# Altium PCB Qadrature FM demodulator.PcbDoc (part 1 of 2)
Units mm, origin at the board's own origin, x right, y up, seen from the top; angles counter-clockwise.
Board outline 65 x 50 mm, 2 copper layers (Top Layer, Bottom Layer); 40 components, 19 nets, 115 pads, 103 vias.
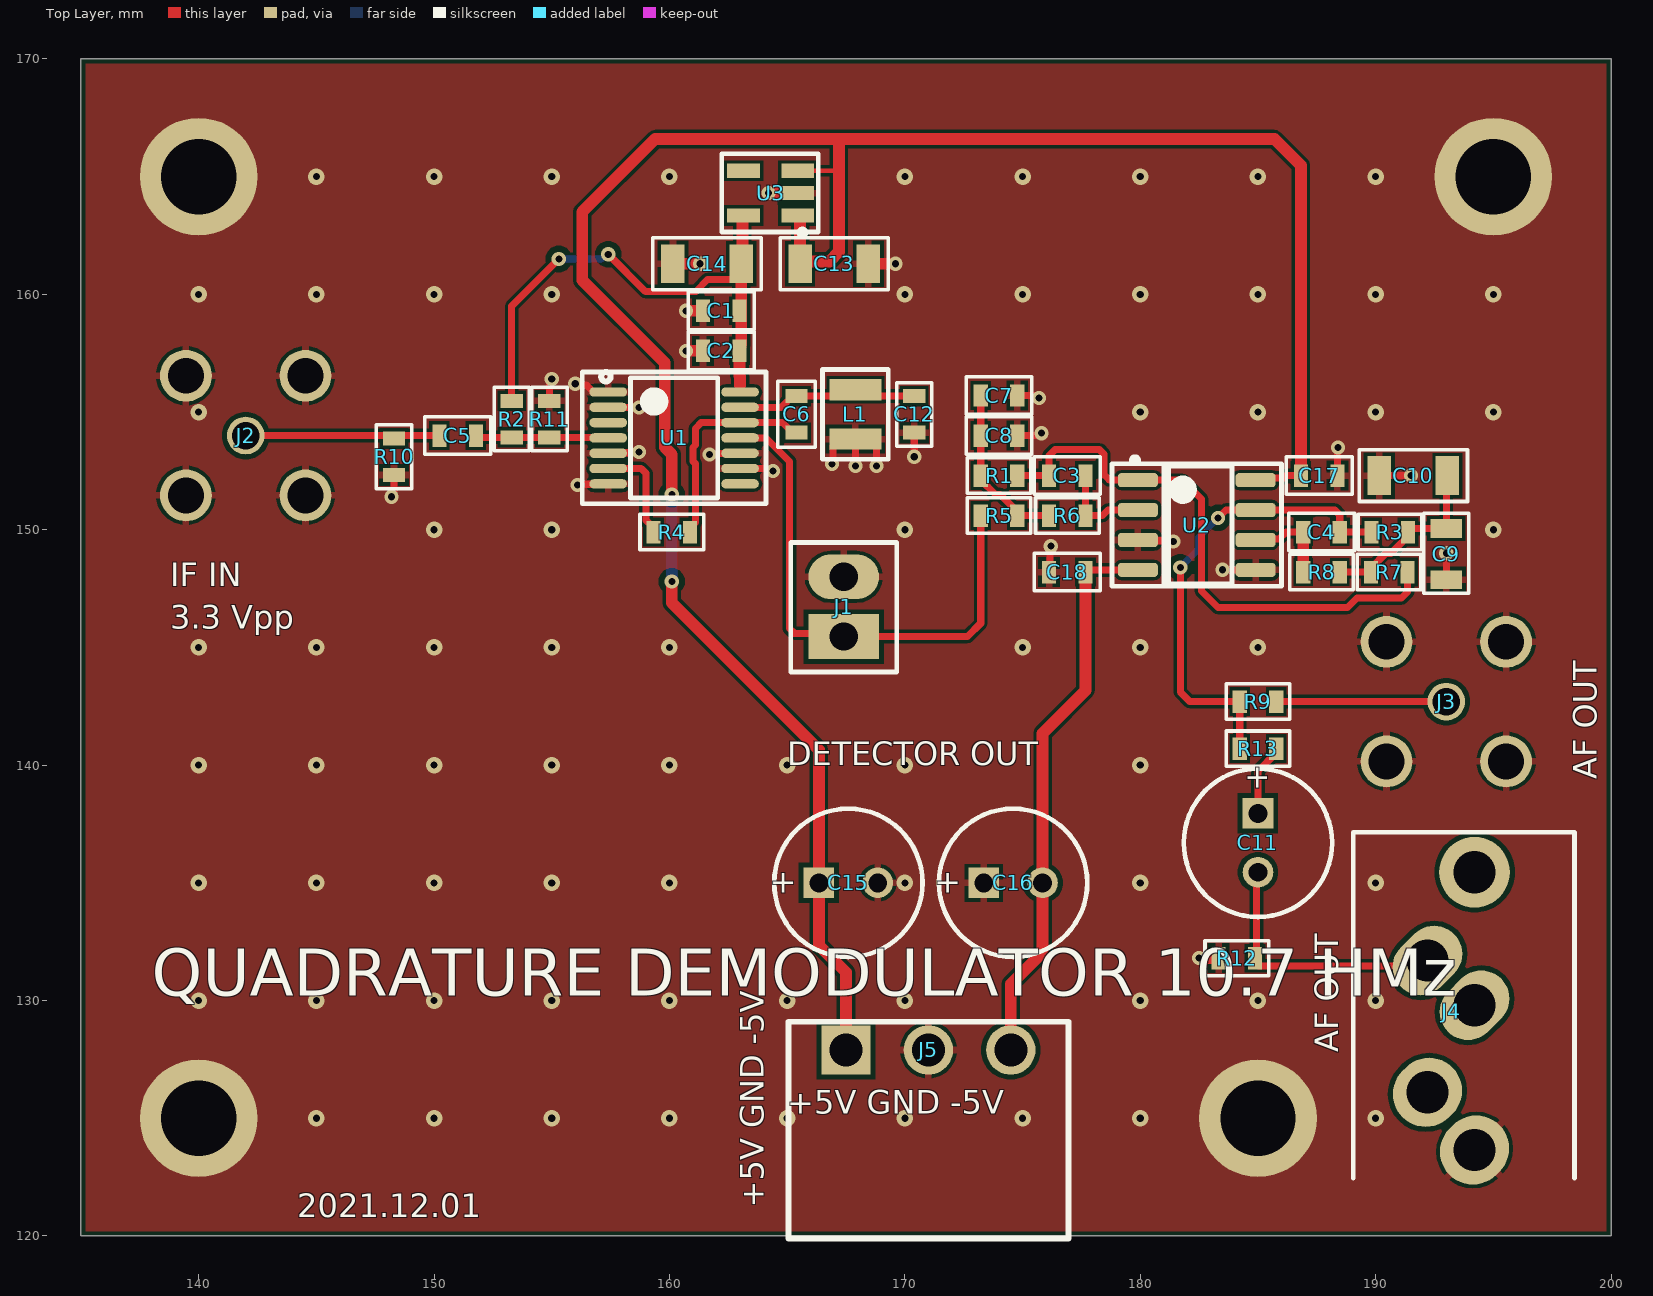
[diagram p0: Top Layer view]
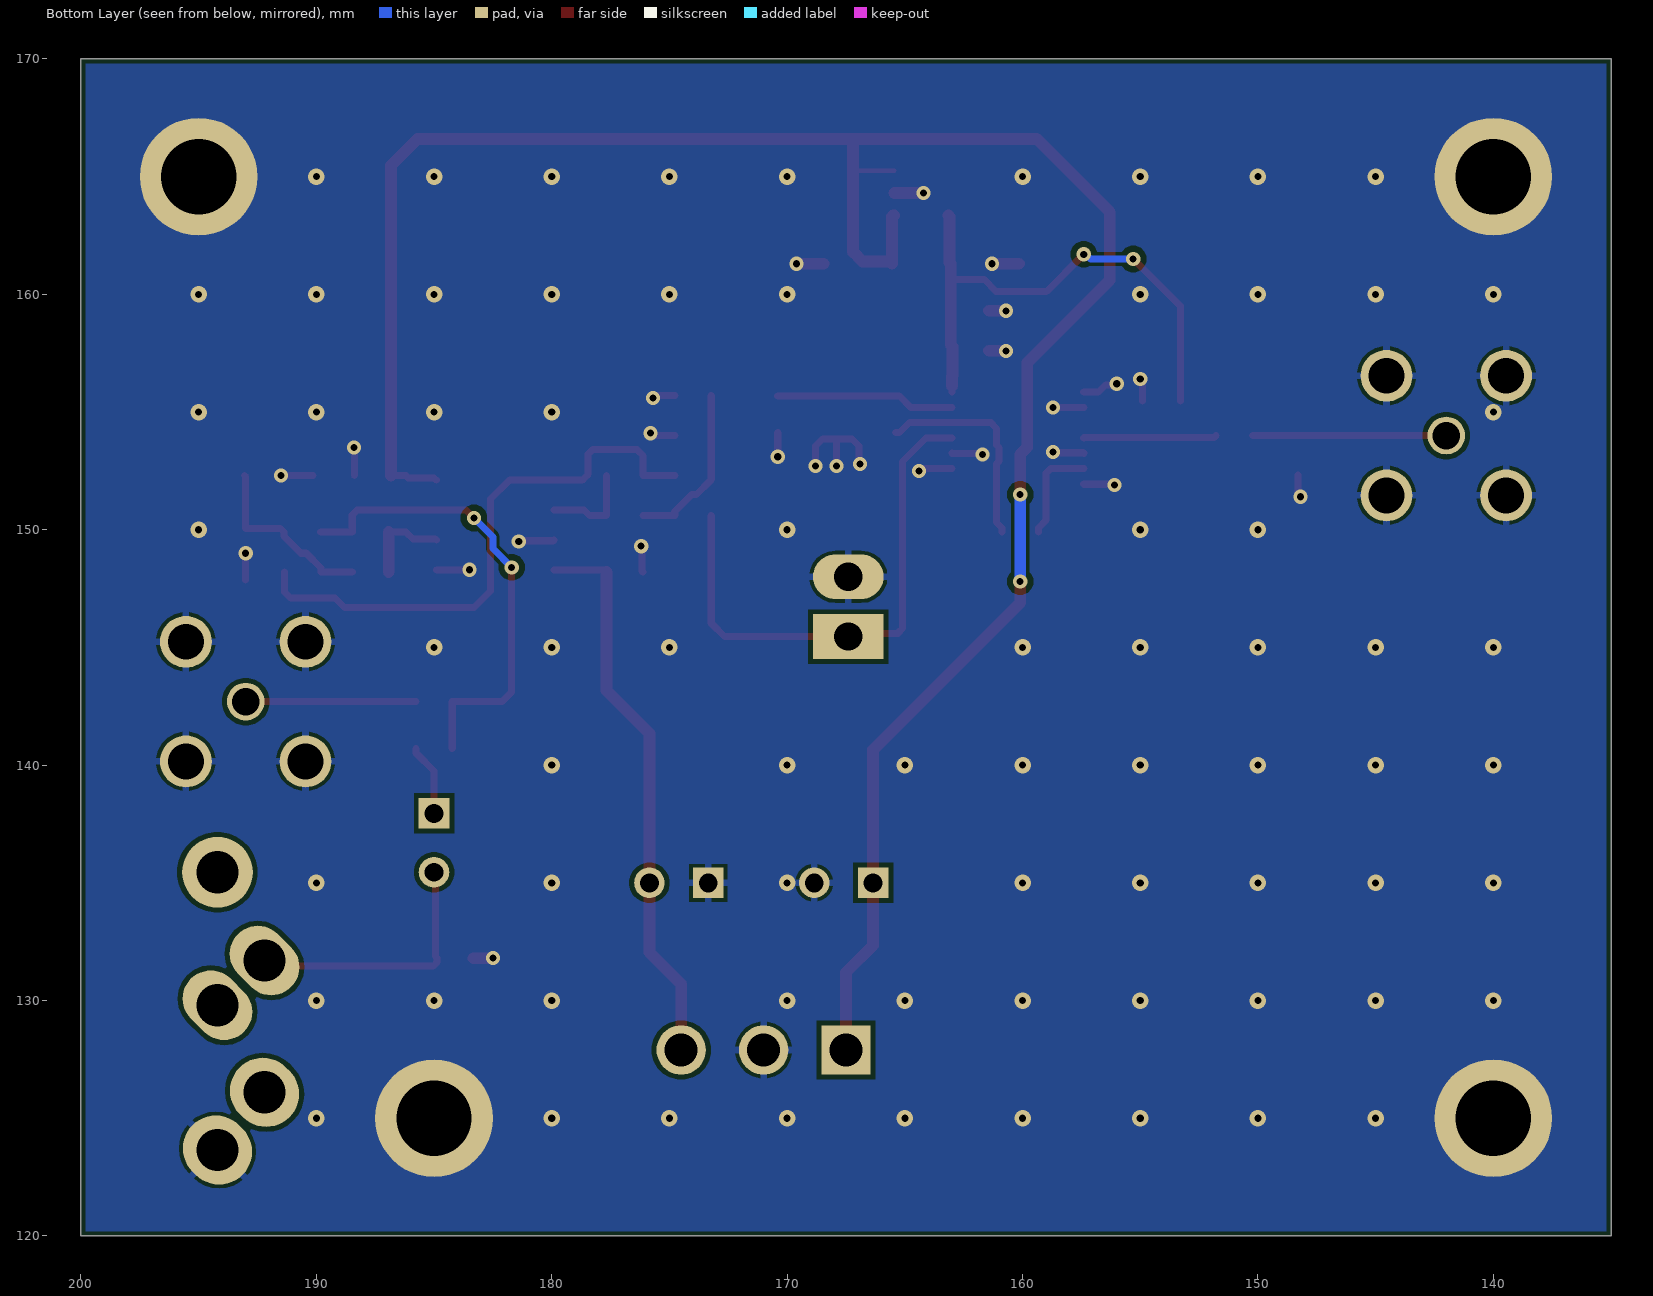
[diagram p1: Bottom Layer view, seen from below]
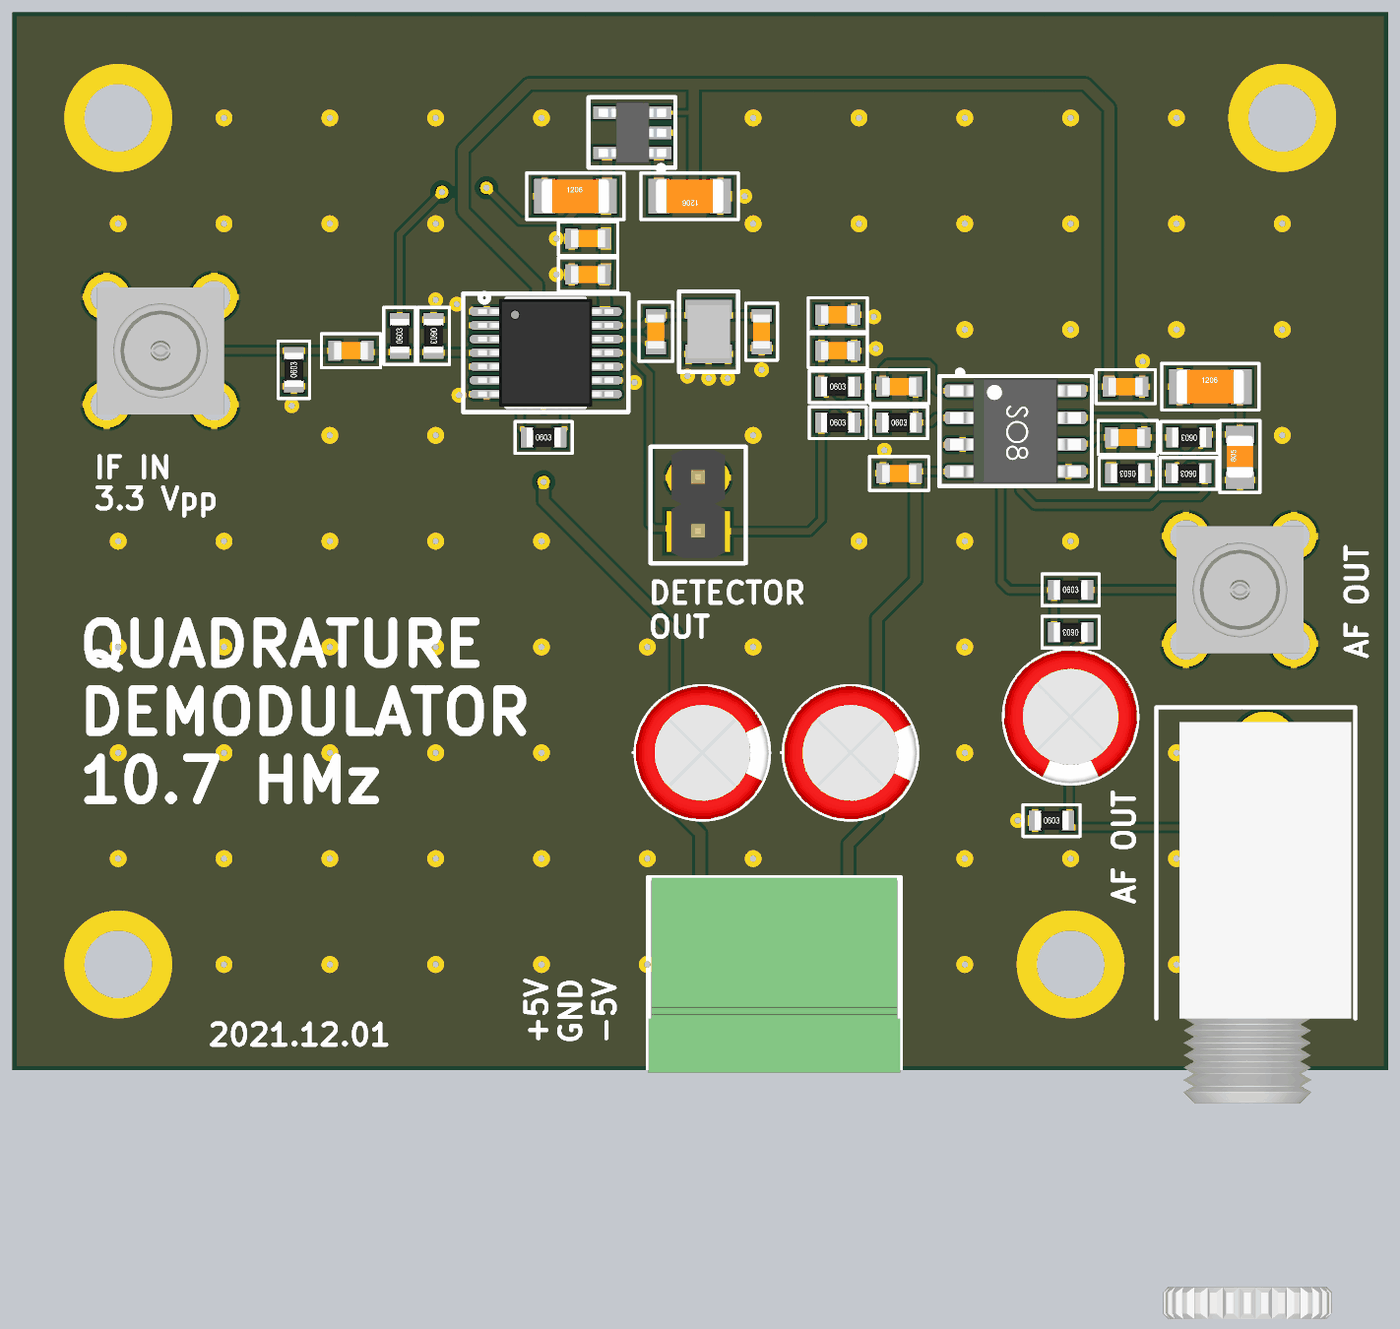
[diagram p2: 3D render of the assembled board from above, using the file's embedded part models]

## Layer stack, top to bottom
Top Solder: solder mask 0.0102, Solder Resist, Dk 3.5
Top Layer: signal copper 0.0356
Dielectric 1: dielectric 0.32, FR-4, Dk 4.8
Bottom Layer: signal copper 0.0356
Bottom Solder: solder mask 0.0102, Solder Resist, Dk 3.5

## Board outline
135,120 200,120 200,170 135,170

## Design rules (kind name [scope] priority, off if disabled: settings)
Clearance [All] p1: gap=0.127 ignorepadtopadclearanceinfootprint=FALSE except(0: Arc-Hole Track-Hole SMDPad-Hole THPad-Hole Via-Hole Fill-Hole Poly-Hole Region-Hole Text-Hole; 0.152: Arc-Text Track-Text SMDPad-Text THPad-Text Via-Text Fill-Text Poly-Text Region-Text Text-Text; 0.2: Arc-SMDPad Arc-THPad Track-SMDPad Track-THPad SMDPad-THPad SMDPad-Via THPad-THPad THPad-Fill THPad-Poly THPad-Region; 0.254: Arc-Via Track-Via Via-Via Via-Fill Via-Poly Via-Region; 0.5: THPad-Via)
ComponentClearance [All] p1: gap=0.15 collisioncheckmode=3 verticalgap=0.254 showdistances=FALSE
HoleSize [All] p1: absolutevalues=TRUE maxlimit=6.3 minlimit=0.2 maxpercent=80.000 minpercent=20.000
HoleToHoleClearance [All] p1: gap=0.5 allowstackedmicrovias=TRUE
MinimumAnnularRing [All] p1: minimumring=0.13
MinimumSolderMaskSliver [All] p1: minsoldermaskwidth=0.2
PlaneConnect [All] p1: planeconnectstyle=Direct reliefexpansion=0.508 reliefentries=4 reliefconductorwidth=0.254 reliefairgap=0.254
PolygonConnect "Free pads to gnd" [(ObjectKind = 'Pad') And (Component = 'Free') vs InNet('GND')] p1: connectstyle=Direct reliefconductorwidth=0.254 reliefentries=4 polygonreliefangle="90 Angle" airgapwidth=0.254
PolygonConnect "Footprint connection" [All vs HasFootprint('DCC6C') or HasFootprint('32K243-40ML5 ro4003c') or HasFootprint('CONUFL001-SMD-T')] p2: connectstyle=Direct reliefconductorwidth=0.254 reliefentries=4 polygonreliefangle="90 Angle" airgapwidth=0.254
PolygonConnect "Via connection" [All vs IsVia or IsShieldingVia or IsStitchingVia] p3: connectstyle=Direct reliefconductorwidth=0.254 reliefentries=4 polygonreliefangle="90 Angle" airgapwidth=0.254
PolygonConnect [All] p4: connectstyle=Relief reliefconductorwidth=0.3 reliefentries=4 polygonreliefangle="90 Angle" airgapwidth=0.15
RoutingCorners [All] p1: cornerstyle=45-Degree minsetback=1 maxsetback=2.54
RoutingVias [All] p1: holewidth=0.3 width=0.6 viastyle="Through Hole" minholewidth=0.3 minwidth=0.6 maxholewidth=6 maxwidth=7
SilkToSilkClearance [All] p1: silktosilkclearance=0
SilkToSolderMaskClearance [IsPad] p1: minsilkscreentomaskgap=0.15 clearancetoexposedcopper=TRUE
SolderMaskExpansion SolderMaskExpansion_1 [IsVia] p1: expansion=-0.1 istentingtop=FALSE
SolderMaskExpansion [All] p2: expansion=0.05 istentingtop=FALSE
UnRoutedNet [All] p1: checkbadconnections=TRUE
Width [All] p1: maxlimit=3 minlimit=0.127 preferedwidth=0.2
21 further rules are at their usual default settings.

## Components (designator, comment, footprint, x,y, rotation, side; value= is the part's Value field where it differs from the comment)
C1 "1u, 25V, X7R" SMD0603 162.2,159.3 r0 top
C2 "1u, 25V, X7R" SMD0603 162.2,157.6 r0 top
C3 "10n, 50V, C0G" SMD0603 176.9,152.3 r180 top
C4 "10n, 50V, C0G" SMD0603 187.7,149.9 r0 top
C5 "10n, 50V, C0G" SMD0603 151,154 r0 top
C6 "100p, 250V, C0G" SMD0603 165.4,154.9 r270 top
C7 "6n8, 50V, C0G" SMD0603 174,155.7 r180 top
C8 "18n, 35V, C0G" SMD0603 174,154 r180 top
C9 "47p, 50V, C0G" SMD0805 193,149 r90 top
C10 "100n, 100V, C0G, 5%" SMD1206 191.6,152.3 r0 top
C11 "100u, alu, 25V" WCAP-ATLI_6.3x11x2.5 185,136.7 r90 top
C12 "120p, 50V, C0G" SMD0603 170.4,154.9 r90 top
C13 "10u, 25V, X7R" SMD1206 167,161.3 r180 top
C14 "10u, 25V, X7R" SMD1206 161.6,161.3 r0 top
C15 "100u, alu, 25V" WCAP-ATLI_6.3x11x2.5 167.6,135 r180 top
C16 "100u, alu, 25V" WCAP-ATLI_6.3x11x2.5 174.6,135 r180 top
C17 "1u, 25V, X7R" SMD0603 187.6,152.3 r180 top
C18 "1u, 25V, X7R" SMD0603 176.9,148.2 r0 top
J1 "61300211121" "Header 2 2.54mm" 167.4,145.46 r180 top
J2 "MCX 73366-0061" 73366-0061 142,154 r0 top
J3 "MCX 73366-0061" 73366-0061 193,142.7 r0 top
J4 "35RAPC4BV4" 35RAPC4BV4 193.35,122.45 r90 top
J5 "691322110003" 691322110003 171,124.5 r0 top
L1 "1u, 5%" WE-KI_1008 167.9,154.9 r270 top
R1 "3k6, 1%" "SMD0603 - R" 174,152.3 r0 top
R2 "10k, 1%" "SMD0603 - R" 153.3,154.7 r90 top
R3 "1k2, 1%" "SMD0603 - R" 190.6,149.9 r180 top
R4 "51R, 1%" "SMD0603 - R" 160.1,149.9 r0 top
R5 "3k6, 1%" "SMD0603 - R" 174,150.6 r0 top
R6 "2k4, 1%" "SMD0603 - R" 176.9,150.6 r0 top
R7 "1k2, 1%" "SMD0603 - R" 190.575,148.2 r180 top
R8 "1k1, 1%" "SMD0603 - R" 187.7,148.2 r180 top
R9 "51R, 1%" "SMD0603 - R" 185,142.7 r0 top
R10 "1M, 1%" "SMD0603 - R" 148.3,153.1 r90 top
R11 "10k, 1%" "SMD0603 - R" 154.9,154.7 r270 top
R12 "10k, 1%" "SMD0603 - R" 184.1,131.8 r0 top
R13 "51R, 1%" "SMD0603 - R" 185,140.7 r180 top
U1 "SN74LVC86APWR" TSSOP14 160.2,153.9 r0 top
U2 "NE5532DR" SOIC08 182.4,150.2 r0 top
U3 "LDK320M33R" SOT23-5 164.3,164.3 r180 top

## Footprints (in the part's own frame and the unit in brackets; to place one, negate y for a bottom-side part, rotate by r counter-clockwise, add the part's x,y. Pads: shape width x height; smd on the part's side, far side on the other; paste and mask are expansions set on the pad)
35RAPC4BV4 [mm] "3.5MM JACK"
  oval 2.8x3 hole 1.8 rot 45: 1(1.2,-0.85) 2(3.65,1.15)
  oval 2.4x3.2 hole 1.8 rot 45: 3(7.35,-0.85) 4(9.25,1.15)
  round 3 hole 1.8: 5(13,-0.85)
  silkscreen extent 0,-5.1 14.7,4.3, body extent -14.2,-4.9 14,3.99, height 12.3
73366-0061 [mm]
  round 1.6 hole 1.17: 1(0,0)
  round 2.2 hole 1.52: 2(-2.54,-2.54) 2(-2.54,2.54) 2(2.54,-2.54) 2(2.54,2.54)
  body extent -3,-3 3,3, height 5.5
691322110003 [mm] "Horizontal PCB Header, pitch 3.5mm, 03p"
  rect 2.1x2.1 hole 1.4: 1(-3.5,3.4)
  round 2.1 hole 1.4: 2(0,3.4) 3(3.5,3.4)
  silkscreen extent -5.95,-4.6 5.95,4.6, body extent -5.95,-4.6 5.95,4.6, height 7.3
"Header 2 2.54mm" [mm]
  rect 3x1.9 hole 1.2: 1(0,0)
  oval 3x1.9 hole 1.2: 2(0,-2.54)
  silkscreen extent -2.25,-4 2.25,1.5, body extent -1.27,-3.84 1.27,1.24, height 8.67
SMD0603 [mm] "2-Leads, Body 1,60x0,85mm(0603), IPC Medium Density"
  rect 0.6x0.95 smd: 1(-0.775,0) 2(0.775,0)
  silkscreen extent -1.4,-0.8 1.4,0.8, body extent -0.8,-0.4 0.8,0.4, height 0.7
"SMD0603 - R" [mm] "2-Leads, Body 1,60x0,85mm(0603), IPC Medium Density"
  rect 0.6x0.95 smd: 1(-0.775,0) 2(0.775,0)
  silkscreen extent -1.35,-0.75 1.35,0.75, body extent -0.8,-0.45 0.8,0.45, height 0.5
SMD0805 [mm] "2-Leads, Body 2,00x1,25mm(0805), IPC Medium Density"
  rect 0.8x1.35 smd: 1(-1.125,0) 2(1.05,0)
  silkscreen extent -1.7,-0.95 1.7,0.95, body extent -1,-0.62 1,0.63, height 0.78
SMD1206 [mm] "Chip Resistor, 2-Leads, Body 3,20x1,60mm(1206), IPC Medium Density"
  rect 1x1.65 smd: 1(-1.45,0) 2(1.45,0)
  silkscreen extent -2.3,-1.1 2.3,1.1, body extent -1.6,-0.8 1.6,0.8, height 1
SOIC08 [mm] "SOIC, 8-Leads, Body 4,90x3,90mm, Pitch 1,27mm, IPC Medium Density"
  rrect50% 1.7x0.6 smd: 1(-2.5,1.905) 2(-2.5,0.635) 3(-2.5,-0.635) 4(-2.5,-1.905) 5(2.5,-1.905) 6(2.5,-0.635) 7(2.5,0.635) 8(2.5,1.905)
  silkscreen extent -3.6,-2.6 3.6,2.88, body extent -3.1,-2.5 3.1,2.5, height 1.75
SOT23-5 [mm] "SOT23, 5-Leads, Body 2,90x2,80mm, Pitch 0,95mm, IPC Medium Density"
  rect 1.4x0.6 smd: 1(-1.15,0.95) 2(-1.15,0) 3(-1.15,-0.95) 4(1.15,-0.95) 5(1.15,0.95)
  silkscreen extent -2.02,-1.68 2.08,1.8, body extent -1.6,-1.45 1.6,1.45, height 0.94
TSSOP14 [mm] "TSSOP, 14-Leads, Body 5,00x4,40mm, Pitch 0,65mm, IPC Medium Density"
  oval 1.6x0.4 smd: 1(-2.8,1.95) 2(-2.8,1.3) 3(-2.8,0.65) 4(-2.8,0) 5(-2.8,-0.65) 6(-2.8,-1.3) 7(-2.8,-1.95) 8(2.8,-1.95) 9(2.8,-1.3) 10(2.8,-0.65) 11(2.8,0) 12(2.8,0.65) 13(2.8,1.3) 14(2.8,1.95)
  silkscreen extent -3.9,-2.8 3.9,2.8, body extent -3.2,-2.55 3.2,2.55, height 1.2
WCAP-ATLI_6.3x11x2.5 [mm] "Aluminum Electrolytic Capacitors, 6.3x11mm"
  rect 1.3x1.3 hole 0.8: 1(1.25,0)
  round 1.3 hole 0.8: 2(-1.25,0)
  silkscreen extent -3.15,-3.15 3.15,3.15, body extent -3.14,-3.15 3.15,3.15, height 11.31
WE-KI_1008 [mm] "SMD Wire Wound Ceramic Inductor, body 2.5x2mm"
  rect 0.9x2.2 smd: 1(-1.05,0) 2(1.05,0)
  silkscreen extent -1.91,-1.4 1.91,1.4, body extent -1.25,-1 1.25,1, height 1.12

## Part data
C1 C2 C17 C18: library part CGA3E1X7R1E105K080AC, "CAP CER 1UF 25V X7R 0603", Capacitance=1u, Manufacturer="TDK Corporation", Operating Temperature="-55°C ~ 125°C", Package / Case="0603 (1608 Metric)", Ratings=AEC-Q200, Supplier Part Number 1=810-CGA3E1X7R1E105K, Temperature Coefficient=X7R, Tolerance=±10%, Voltage - Rated=25V, Applications=Automotive, Category=Capacitors, ComponentLink1Description=https://product.tdk.com/info/en/catalog/datasheets/mlcc_automotive_general_en.pdf, ComponentLink1URL=https://product.tdk.com/info/en/catalog/datasheets/mlcc_automotive_general_en.pdf, Failure Rate=-, Features=-, Height - Seated (Max)=-, Lead Spacing=-, Lead Style=-, Manufacturer Part Number=CGA3E1X7R1E105K080AC, Mounting Type="Surface Mount, MLCC", Packaging="Cut Tape (CT)", Part Status=Active, Pricing 1="1=0.2, 10=0.135, 100=0.0686, 500=0.04696, 1000=0.04154 (USD)", RoHS="RoHS Compliant", Size / Dimension="0.063\" L x 0.032\" W (1.60mm x 0.80mm)", Stock 1=109509, Supplier 1=Mouser, Supplier 2=Farnell, Supplier 3=Digi-Key, Supplier Part Number 2=2346962, Supplier Part Number 3=445-6931-1-ND, Thickness (Max)="0.035\" (0.90mm)"
C3 C4 C5: library part GRM1885C1H103JA01D, "Multilayer Ceramic Capacitors MLCC - SMD/SMT 0603 50VDC 10000pF 5% C0G", Capacitance=10n, Capacitance - nF="10 nF", Capacitance - pF="10000 pF", Case Code - in=0603, Case Code - mm=1608, Dielectric="C0G (NP0)", Manufacturer="Murata Electronics", Maximum Operating Temperature="+ 125 C", Minimum Operating Temperature="- 55 C", Package / Case="0603 (1608 metric)", Supplier Part Number 1=81-GRM1885C1H103JA1D, Tolerance="5 %", Voltage Rating DC="50 VDC", Brand="Murata Electronics", Category="Multilayer Ceramic Capacitors MLCC - SMD/SMT", Class="Class 1", CNHTS=8532241000, ComponentLink1Description=http://www.mouser.com/datasheet/2/281/murata_03052018_GRM_Series_1-1310166.pdf, ComponentLink1URL=http://www.mouser.com/datasheet/2/281/murata_03052018_GRM_Series_1-1310166.pdf, Height="0.8 mm", HTS Code=8532240020, Length="1.6 mm", Manufacturer Part Number=GRM1885C1H103JA01D, Minimum Order Quantity=1, Packaging="Cut Tape", Pricing 1="1=0.183, 10=0.129, 100=0.065, 500=0.045, 1000=0.039, 4000=0.030, 8000=0.027, 24000=0.025 (EUR)", Product="General Type MLCCs", Product Type="Ceramic Capacitors", Reeling=True, RoHS="RoHS Compliant", RoHS - Mouser=Y, Series=GRM, Standard Pack Qty=4000, Stock 1=217291, Subcategory=Capacitors, Supplier 1=Mouser, Supplier 2=Farnell, Supplier Part Number 2=2456107, TARIC=8532240000, Termination=Standard, Termination Style=SMD/SMT, Type="Chip Multilayer Ceramic Capacitor for General Purpose", Width="0.8 mm"
C6: library part 885342006003, "CAP CER 100PF 250V C0G/NP0 0603", Capacitance=100p, Manufacturer="Wurth Electronics Inc.", Operating Temperature="-55°C ~ 125°C", Package / Case="0603 (1608 Metric)", Ratings=-, Supplier Part Number 1=732-12167-1-ND, Temperature Coefficient="C0G, NP0", Tolerance=±5%, Voltage - Rated=250V, Applications="General Purpose", Category=Capacitors, ComponentLink1Description=https://katalog.we-online.de/pbs/datasheet/885342006003.pdf, ComponentLink1URL=https://katalog.we-online.de/pbs/datasheet/885342006003.pdf, Failure Rate=-, Features=-, Height - Seated (Max)=-, Lead Spacing=-, Lead Style=-, Manufacturer Part Number=885342006003, Mounting Type="Surface Mount, MLCC", Notification="Current market demand for these product types have resulted in fluctuating and extending lead times. Lead times may differ.", Packaging="Cut Tape (CT)", Part Status=Active, Pricing 1="1=0.1, 10=0.043, 100=0.0385, 500=0.03406 (USD)", RoHS="RoHS Compliant", Size / Dimension="0.063\" L x 0.031\" W (1.60mm x 0.80mm)", Stock 1=43, Supplier 1=Digi-Key, Supplier 2=Farnell, Supplier 3=Mouser, Supplier Part Number 2=2812519, Supplier Part Number 3=710-885342006003, Thickness (Max)="0.034\" (0.87mm)"
C7: library part GRM1885C1H682JA01D, "Multilayer Ceramic Capacitors MLCC - SMD/SMT 0603 6,800pF 50volts C0G +/-5%", Capacitance=6n8, Case Code (Imperial)=0603, Case Code (Metric)=1608, Dielectric=C0G, Manufacturer=Murata, Max Operating Temperature=125°C, Min Operating Temperature=-55°C, Package Quantity=4000, Supplier Part Number 1=81-GRM1885C1H682JA1D, Tolerance=5%, Voltage Rating=50V, Case/Package=0603, ComponentLink1Description=https://datasheet.ciiva.com/29537/partnumbering-e-01-29537912.pdf?src-supplier=Digi-Key, ComponentLink1URL=https://datasheet.ciiva.com/29537/partnumbering-e-01-29537912.pdf?src-supplier=Digi-Key, Depth=0.8mm, Height=0.8mm, Lead Free="Lead Free", Length=1.6mm, Manufacturer Part Number=GRM1885C1H682JA01D, Mount="Surface Mount", Packaging="Tape and Reel", Pricing 1="1 = 0.20000, 10 = 0.13500, 50 = 0.13500, 100 = 0.06800, 1000 = 0.04100, 10000 = 0.02900 (USD)", RoHS=Yes, Stock 1=117152, Supplier 1=Mouser, Supplier 2=Digi-Key, Supplier 3=Arrow, Supplier Part Number 2=490-11477-1-ND, Supplier Part Number 3=GRM1885C1H682JA01D, Termination=SMD/SMT, Thickness=0.035inch, Voltage Rating (DC)=50V, Width=0.031inch
C8: library part C1608C0G1V183J080AC, "Cap Ceramic 0.018uF 35V C0G 5% Pad SMD 0603 125C T/R", Capacitance=18n, Case Code (Imperial)=0603, Case Code (Metric)=1608, Dielectric Material=Ceramic, Manufacturer=TDK, Max Operating Temperature=125°C, Min Operating Temperature=-55°C, Supplier Part Number 1=810-C1608C0G1V183JAC, Tolerance=5%, Voltage Rating=35V, Case/Package=0603, Category="Ceramic Capacitors", ComponentLink1Description=https://product.tdk.com/info/en/catalog/spec/mlccspec_commercial_general_midvoltage_en.pdf?src-supplier=Digi-Key, ComponentLink1URL=https://product.tdk.com/info/en/catalog/spec/mlccspec_commercial_general_midvoltage_en.pdf?src-supplier=Digi-Key, Lead Free="Lead Free", Length=0.063inch, Manufacturer Part Number=C1608C0G1V183J080AC, Mount="Surface Mount", Packaging="Tape and Reel", Pricing 1="1=0.37000, 10=0.16800, 50=0.16800, 100=0.14300, 1000=0.08800, 10000=0.06600 (USD)", RoHS=Yes, RoHS Compliant=Yes, Stock 1=3185, Supplier 1=Mouser, Supplier 2=Farnell, Supplier 3=Digi-Key, Supplier 4=Newark, Supplier Part Number 2=3416084, Supplier Part Number 3=445-174558-1-ND, Supplier Part Number 4=71AH3230, Thickness=0.035inch, Voltage Rating (DC)=35V, Width=0.031inch
C9: library part MC0805N470J500CT, "MULTICOMP - MC0805N470J500CT - CAP, MLCC, C0G/NP0, 47PF, 50V, 0805", Capacitance=47, Capacitance Tolerance="± 5%", Ceramic Capacitor Case="0805 [2012 Metric]", Dielectric Characteristic="C0G / NP0", Manufacturer=MULTICOMP, Operating Temperature Max=125, Operating Temperature Min=-55, Supplier Part Number 1=1759199, Voltage Rating=50, Automotive Qualification Standard=-, ComponentLink1Description=http://www.farnell.com/datasheets/1901289.pdf, ComponentLink1URL=http://www.farnell.com/datasheets/1901289.pdf, Manufacturer Part Number=MC0805N470J500CT, MSL=-, Packaging="Cut Tape", Pricing 1="10=0.0144, 100=0.0117, 500=0.0083, 1000=0.0072, 2000=0.0057 (GBP)", Product Range="MC Series", RoHS=YES, Stock 1=26554, Supplier 1=Farnell, SVHC="No SVHC (07-Jul-2017)<!--FANDB--><div class=\"features-and-benefits-container\"><div class=\"features-and-benefits-desc-container\"><span class=\"features-and-benefits-container-desc\">SMD Multilayer Ceramic Capacitor, 0805 [2012 Metric], 47 pF, 50 V, ± 5%, C0G / NP0, MC Series</span></div><div class=\"features-and-benefits-description\"><span class=\"features-benefits-value\">The Multicomp MC series is general purpose MLCC capacitors with C0G (NP0) dielectric material which provides high electrical precision, stability and reliability. This MLCC capacitor consists of a conducting material and electrodes with high density and high efficiency ceramic condensers.</span></div><div class=\"features-and-benefits-list\"><ul class=\"features-and-benefits-list-list\"><li class=\"features-and-benefits-list-item\">Small size with higher capacitance values</li><li class=\"features-and-benefits-list-item\">0201, 0402, 0603, 0805, 1206, 1210, 1812 case sizes available</li><li class=\"features-and-benefits-list-item\">Capacitance value ranging from 0.1pF to 0.1?F</li><li class=\"features-and-benefits-list-item\">Capacitor with lead free termination (pure Tin)</li><li class=\"features-and-benefits-list-item\">High electrical precision, stability and reliability</li><li class=\"features-and-benefits-list-item\">Rated voltage of 10V, 16V, 25V, 50V, 100V</li><li class=\"features-and-benefits-list-item\">Operating temperature of -55°C to +125°C</li><li class=\"features-and-benefits-list-item\">Temperature coefficient (TCR) of ±30"
C10: library part GRM31C5C2A104JA01L, "CAP CER 0.1UF 100V C0G/NP0 1206", Capacitance=100n, Dielectric=C0G, Manufacturer="Murata Electronics North America", Operating Temperature="-55°C ~ 125°C", Package / Case="1206 (3216 Metric)", Ratings=-, Supplier Part Number 1=81-GRM31C5C2A104JA1L, Temperature Coefficient="C0G, NP0", Tolerance=±5%, Voltage - Rated=100V, Applications="General Purpose", Category=Capacitors, ComponentLink1Description=http://search.murata.co.jp/Ceramy/image/img/A01X/G101/ENG/GRM31C5C2A104JA01-01.pdf, ComponentLink1URL=http://search.murata.co.jp/Ceramy/image/img/A01X/G101/ENG/GRM31C5C2A104JA01-01.pdf, Failure Rate=-, Features=-, Height - Seated (Max)=-, Lead Spacing=-, Lead Style=-, Manufacturer Part Number=GRM31C5C2A104JA01L, Mounting Type="Surface Mount, MLCC", Notification="Current market demand for these product types have resulted in fluctuating and extending lead times. Lead times may differ.", Packaging="Cut Tape (CT)", Part Status=Active, Pricing 1="1=0.82, 10=0.581, 100=0.3823, 500=0.2832, 1000=0.24072 (USD)", RoHS="RoHS Compliant", Size / Dimension="0.126\" L x 0.063\" W (3.20mm x 1.60mm)", Stock 1=1640, Supplier 1=Mouser, Supplier 2=Digi-Key, Supplier Part Number 2=490-16315-1-ND, Thickness (Max)="0.071\" (1.80mm)"
C11 C15 C16: library part 860010473007, "CAP 100 UF 20% 25 V", Capacitance=100uF, Case/Package=Radial, Manufacturer="Wurth Electronics", Max Operating Temperature=85°C, Min Operating Temperature=-40°C, Package Quantity=1500, Ripple Current=209mA, Supplier Part Number 1=710-860010473007, Tolerance=20%, Voltage Rating=25V, Category="Aluminum Electrolytic Capacitors", ComponentLink1Description=https://datasheet.ciiva.com/48693/001280151-da-01-en-wcap-atg8-alu-elec-caps-860010473007-48693591.pdf?src-supplier=Conrad, ComponentLink1URL=https://datasheet.ciiva.com/48693/001280151-da-01-en-wcap-atg8-alu-elec-caps-860010473007-48693591.pdf?src-supplier=Conrad, Diameter=6.3mm, Height=11mm, Height - Seated (Max)=0.492inch, Lead Pitch=0.098inch, Life (Hours)=2000Hour, Manufacturer Part Number=860010473007, Material=Aluminium, Mount="Through Hole", Packaging="Tape and Reel", Polarity=Polar, Pricing 1="1=0.14000, 10=0.13400, 25=0.13400, 50=0.11200, 100=0.09800, 250=0.08700 (USD)", REACH SVHC=Unknown, RoHS=Yes, Stock 1=1494, Supplier 1=Mouser, Supplier 2=Farnell, Supplier 3=Digi-Key, Supplier Part Number 2=2465675, Supplier Part Number 3=732-8630-1-ND, Voltage Rating (DC)=25V
C12: library part CC0603JRNPO9BN121, "Surface Mount Ceramic Multilayer Capacitor 120pF 5% C0G 50V 0603 Paper T/R", Capacitance=120pF, Case Code (Imperial)=0603, Case Code (Metric)=1608, Dielectric=C0G, Dielectric Material=Ceramic, Insulation Resistance=100GR, Manufacturer=Yageo, Max Operating Temperature=125°C, Min Operating Temperature=-55°C, Package Quantity=1, Supplier Part Number 1=603-CC603JRNPO9BN121, Tolerance=5%, Voltage Rating=50V, Case/Package=0603, Category="Ceramic Capacitors", ComponentLink1Description=https://datasheet.ciiva.com/26862/getdatasheetpartid-137962-26862760.pdf?src-supplier=Verical, ComponentLink1URL=https://datasheet.ciiva.com/26862/getdatasheetpartid-137962-26862760.pdf?src-supplier=Verical, ComponentLink2Description=https://datasheet.ciiva.com/144/mlccorderingcode-144699.pdf?src-supplier=Digi-Key, ComponentLink2URL=https://datasheet.ciiva.com/144/mlccorderingcode-144699.pdf?src-supplier=Digi-Key, ComponentLink3Description=https://datasheet.ciiva.com/8033/1443161-8033719.pdf?src-supplier=Element14, ComponentLink3URL=https://datasheet.ciiva.com/8033/1443161-8033719.pdf?src-supplier=Element14, ComponentLink4Description=https://datasheet.ciiva.com/17437/upy-gp-np0-16v-to-50v-8-17437015.pdf?src-supplier=Avnet+Europe, ComponentLink4URL=https://datasheet.ciiva.com/17437/upy-gp-np0-16v-to-50v-8-17437015.pdf?src-supplier=Avnet+Europe, ComponentLink5Description=https://datasheet.ciiva.com/8033/1443161-8033720.pdf?src-supplier=Element14, ComponentLink5URL=https://datasheet.ciiva.com/8033/1443161-8033720.pdf?src-supplier=Element14, ComponentLink6Description=https://datasheet.ciiva.com/144/mlccorderingcode-144697.pdf?src-supplier=Digi-Key, ComponentLink6URL=https://datasheet.ciiva.com/144/mlccorderingcode-144697.pdf?src-supplier=Digi-Key, ComponentLink7Description=https://datasheet.ciiva.com/11465/upy-gp-np0-16v-to-50v-8-11465007.pdf?src-supplier=Avnet, ComponentLink7URL=https://datasheet.ciiva.com/11465/upy-gp-np0-16v-to-50v-8-11465007.pdf?src-supplier=Avnet, ComponentLink8Description=https://datasheet.ciiva.com/144/mlccorderingcode-144698.pdf?src-supplier=Digi-Key, ComponentLink8URL=https://datasheet.ciiva.com/144/mlccorderingcode-144698.pdf?src-supplier=Digi-Key, ComponentLink9Description=https://datasheet.ciiva.com/15381/upy-gp-np0-16v-to-50v-8-15381898.pdf?src-supplier=Mouser, ComponentLink9URL=https://datasheet.ciiva.com/15381/upy-gp-np0-16v-to-50v-8-15381898.pdf?src-supplier=Mouser, Depth=0.8mm, Height=0.8mm, Lead Free="Lead Free", Length=1.6mm, Manufacturer Part Number=CC0603JRNPO9BN121, Mount="Surface Mount", Packaging="Tape and Reel", Pricing 1="1=0.10000, 10=0.06400, 50=0.06400, 100=0.02900, 1000=0.01700, 10000=0.01100 (USD)", Radiation Hardening=No, REACH SVHC=Unknown, Resistor Type=Ceramic, RoHS=Yes, RoHS Compliant=Yes, Series=CC, Stock 1=20714, Supplier 1=Mouser, Supplier 2=Farnell, Supplier 3=Digi-Key, Supplier Part Number 2=722091, Supplier Part Number 3=311-1070-1-ND, Termination=SMD/SMT, Thickness=0.035inch, Voltage Rating (DC)=50V, Width=0.031inch
C13 C14: library part GRM31CR71E106KA12L, "MURATA - GRM31CR71E106KA12L - CAP, MLCC, X7R, 10UF, 25V, 1206", Capacitance=10u, Dielectric=X7R, Manufacturer=MURATA, Supplier Part Number 1=81-GRM31CR71E106KA12, ComponentLink1Description=http://www.farnell.com/datasheets/2048746.pdf, ComponentLink1URL=http://www.farnell.com/datasheets/2048746.pdf, Manufacturer Part Number=GRM31CR71E106KA12L, Pricing 1="5=0.278, 50=0.185, 250=0.139, 500=0.134, 1000=0.128 (GBP)", RoHS=YES, Stock 1=8848, Supplier 1=Mouser, Supplier 2=Farnell, Supplier 3=Digi-Key, Supplier Part Number 2=1828837, Supplier Part Number 3=490-6518-1-ND
J1: "CONN HEADER 2 POS 2.54", Current Rating=3A, Insulation Color=Black, Manufacturer="Wurth Electronics Inc.", Material Flammability Rating="UL94 V-0", Operating Temperature="-40°C ~ 125°C", Supplier Part Number 1=710-61300211121, Voltage Rating=250V, Applications=-, Category="Connectors, Interconnects", ComponentLink1Description=https://katalog.we-online.de/em/datasheet/6130xx11121.pdf, ComponentLink1URL=https://katalog.we-online.de/em/datasheet/6130xx11121.pdf, Connector Type=Header, Contact Finish - Mating=Gold, Contact Finish - Post=-, Contact Finish Thickness - Mating=-, Contact Finish Thickness - Post=-, Contact Length - Mating="0.236\" (6.00mm)", Contact Length - Post="0.118\" (3.00mm)", Contact Material="Copper Alloy", Contact Shape=Square, Contact Type="Male Pin", Fastening Type=Push-Pull, Features=-, Ingress Protection=-, Insulation Height="0.100\" (2.54mm)", Insulation Material="Polybutylene Terephthalate (PBT)", Manufacturer Part Number=61300211121, Mated Stacking Heights=-, Mounting Type="Through Hole", Number of Positions=2, Number of Positions Loaded=All, Number of Rows=1, Overall Contact Length="0.454\" (11.54mm)", Packaging=Bulk, Part Status=Active, Pitch - Mating="0.100\" (2.54mm)", Pricing 1="1=0.13, 10=0.106, 25=0.088, 50=0.074, 100=0.067, 1000=0.061 (USD)", RoHS="RoHS Compliant", Row Spacing - Mating=-, Shrouding=Unshrouded, Stock 1=164911, Style="Board to Board or Cable", Supplier 1=Mouser, Supplier 2=Farnell, Supplier 3=Digi-Key, Supplier Part Number 2=2356153, Supplier Part Number 3=732-5315-ND, Termination=Solder
J2 J3: library part 73366-0061, "CONN MCX JACK STR 50 OHM PCB", Dielectric Material="Polytetrafluoroethylene (PTFE)", Housing Color=Gold, Manufacturer="Molex, LLC", Manufacturer Part Number=0733660061, Operating Temperature="-55°C ~ 155°C", Supplier Part Number 1=538-73366-0061, Body Finish=Gold, Body Material=Brass, Cable Group=-, Category="Connectors, Interconnects", Center Contact Material="Beryllium Copper", Center Contact Plating=Gold, ComponentLink1Description=https://www.molex.com/pdm_docs/sd/733660061_sd.pdf, ComponentLink1URL=https://www.molex.com/pdm_docs/sd/733660061_sd.pdf, Connector Style=MCX, Connector Type="Jack, Female Socket", Contact Termination=Solder, Fastening Type=Snap-On, Features=-, Impedance="50 Ohm", Includes=-, Ingress Protection=-, Insertion Loss=-, Mating Cycles=500, Mounting Feature=-, Mounting Type="Through Hole", Packaging=Tray, Part Status=Active, Pricing 1="1=1.95, 10=1.765, 25=1.6572, 50=1.5854, 100=1.5133, 250=1.36916, 500=1.26106, 1000=1.0809, 2500=1.00884 (USD)", RoHS="RoHS Compliant", Shield Termination=Solder, Stock 1=39394, Supplier 1=Mouser, Supplier 2=Digi-Key, Supplier 3=Farnell, Supplier Part Number 2=WM5541-ND, Supplier Part Number 3=1909245
J4: "SWITCHCRAFT - 35RAPC4BV4 - CONNECTOR, RCA/PHONO, JACK, 3WAY", Connector Colour=Black, Manufacturer=SWITCHCRAFT, Supplier Part Number 1=2293877, ComponentLink1Description=http://www.farnell.com/datasheets/921436.pdf, ComponentLink1URL=http://www.farnell.com/datasheets/921436.pdf, Connector Body Material="Plastic Body", Connector Mounting="PCB Mount", Contact Plating="Tin Plated Contacts", Contact Termination="Solder<!--FANDB--><div class=\"features-and-benefits-container\"><div class=\"features-and-benefits-description\"><span class=\"features-benefits-value\">The 35RAPC4BV4 is a 3.5mm Mono and Stereo PC Board Vertical-mount Jack with black PBT+15% glass filled housing, nickel-plated brass bushing, tin-plated phosphor bronze springs and a clear polycarbonate cover. The compact design and an easy of installation onto a PCB make this an ideal solution.</span></div><div class=\"features-and-benefits-list\"><ul class=\"features-and-benefits-list-list\"><li class=\"features-and-benefits-list-item\">5000 cycles Life</li><li class=\"features-and-benefits-list-item\">50", Gender=Jack, Manufacturer Part Number=35RAPC4BV4, No. of Contacts=3, Pin Diameter=3.5, Pricing 1="1=1.28, 25=1.11, 50=1.06, 100=1.01, 250=0.975, 500=0.939 (GBP)", Product Range=-, RoHS=YES, Stock 1=216, Supplier 1=Farnell, Supplier 2=Digi-Key, Supplier Part Number 2=SC1461-ND, SVHC="No SVHC (15-Jun-2015)"
J5: "WR-TBL Serie 3221 - 3.50 mm Horizontal PCB Header, 03p", Supplier Part Number 1=732-2770-ND, ComponentLink1Description=Manufacturer, ComponentLink1URL=http://www.we-online.de, ComponentLink2Description=Datasheet, ComponentLink2URL=http://katalog.we-online.de/em/datasheet/6913221100xx.pdf, Part Number=691322110003, Pin Number=03p, Pitch="3.5 mm", Published Date="Jan 2017", Publisher="Wurth Elektronik", Supplier 1=Digi-Key, Supplier 2=Farnell, Supplier Part Number 2=1841316
L1: library part 744762310A, "Fixed Ind 1UH 120MA 3.3 Ohm SMD", Case Code (Imperial)=1008, Case Code (Metric)=2520, Current Rating=120mA, DC Resistance (DCR)=3.3R, Inductance=1uH, Manufacturer="Wurth Electronics", Max Operating Temperature=125°C, Min Operating Temperature=-40°C, Package Quantity=2000, Resistor Type=Wirewound,Ceramic, Self Resonant Frequency=310MHz, Supplier Part Number 1=710-744762310A, Test Frequency=25MHz, Tolerance=5%, Case/Package=1008, Category="Fixed Inductors", ComponentLink1Description=https://datasheet.ciiva.com/1049/744762310a-1049271.pdf?src-supplier=Digi-Key, ComponentLink1URL=https://datasheet.ciiva.com/1049/744762310a-1049271.pdf?src-supplier=Digi-Key, ComponentLink2Description=https://datasheet.ciiva.com/4978/744762310a-69476-4978731.pdf?src-supplier=Mouser, ComponentLink2URL=https://datasheet.ciiva.com/4978/744762310a-69476-4978731.pdf?src-supplier=Mouser, ComponentLink3Description=https://datasheet.ciiva.com/1049/744762310a-1049272.pdf?src-supplier=Digi-Key, ComponentLink3URL=https://datasheet.ciiva.com/1049/744762310a-1049272.pdf?src-supplier=Digi-Key, ComponentLink4Description=https://datasheet.ciiva.com/1049/744762310a-1049273.pdf?src-supplier=Digi-Key, ComponentLink4URL=https://datasheet.ciiva.com/1049/744762310a-1049273.pdf?src-supplier=Digi-Key, Core Material=Ceramic, Height=0.039inch, Height - Seated (Max)=0.075inch, Length=0.102inch, Manufacturer Part Number=744762310A, Max DC Current=120mA, Mount="Surface Mount", Packaging="Tape and Reel", Pricing 1="1=0.41000, 10=0.38200, 50=0.35700, 100=0.33000, 1000=0.30300, 10000=0.25600 (USD)", Q Factor=35, RoHS=Yes, RoHS Compliant=Yes, Series=WE-KI, Shielding=Unshielded, Stock 1=1904, Supplier 1=Mouser, Supplier 2=Farnell, Supplier 3=Digi-Key, Supplier Part Number 2=3517053, Supplier Part Number 3=732-1832-1-ND, Termination=SMD/SMT, Width=0.083inch
R1 R5: library part RC0603FR-073K6L, "RES SMD 3.6K OHM 1% 1/10W 0603", Case Code (Imperial)=0603, Case Code (Metric)=1608, Manufacturer=Yageo, Max Operating Temperature=155°C, Max Power Dissipation=100mW, Min Operating Temperature=-55°C, Package Quantity=1, Resistance=3k6, Resistance Tolerance=1%, Resistor Type="Thick Film", Supplier Part Number 1=603-RC0603FR-073K6L, Temperature Coefficient=100ppm/°C, Voltage Rating=50V, Working Voltage=75V, Case/Package=0603, Category="Chip SMD Resistors", ComponentLink1Description=https://datasheet.ciiva.com/2455/pyu-r-int-thick-7-2455116.pdf?src-supplier=Digi-Key, ComponentLink1URL=https://datasheet.ciiva.com/2455/pyu-r-int-thick-7-2455116.pdf?src-supplier=Digi-Key, ComponentLink2Description=https://datasheet.ciiva.com/2455/pyu-r-int-thick-7-2455117.pdf?src-supplier=Digi-Key, ComponentLink2URL=https://datasheet.ciiva.com/2455/pyu-r-int-thick-7-2455117.pdf?src-supplier=Digi-Key, ComponentLink3Description=https://datasheet.ciiva.com/2455/pyu-r-int-thick-7-2455118.pdf?src-supplier=Digi-Key, ComponentLink3URL=https://datasheet.ciiva.com/2455/pyu-r-int-thick-7-2455118.pdf?src-supplier=Digi-Key, Features="Moisture Resistant", Height=0.022inch, Lead Free="Lead Free", Length=0.063inch, Manufacturer Part Number=RC0603FR-073K6L, Number of Pins=2, Number of Terminations=2, Packaging="Tape and Reel", Power Rating=100mW, Pricing 1="1=0,10000, 10=0,01800, 50=0,01800, 100=0,00600, 1000=0,00500, 10000=0,00300 (USD)", REACH SVHC=Unknown, RoHS=Yes, RoHS Compliant=Yes, Series=RC, Stock 1=130231, Supplier 1=Mouser, Supplier 2=Farnell, Supplier 3=Digi-Key, Supplier Part Number 2=3495832, Supplier Part Number 3=311-3.60KHRCT-ND, Technology="METAL OXIDE FILM", Termination=SMD/SMT, Tolerance=1%, Voltage Rating (DC)=50V, Width=0.8mm
R2 R11 R12: library part RC0603FR-0710KL, "YAGEO (PHYCOMP) - RC0603FR-0710KL - RES, THICK FILM, 10K, 1%, 0.1W, 0603", Manufacturer="YAGEO (PHYCOMP)", Power Rating=100, Resistance=10k, Resistance Tolerance="± 1%", Resistor Case Style="0603 [1608 Metric]", Resistor Element Material="Thick Film", Supplier Part Number 1=603-RC0603FR-0710KL, Temperature Coefficient="± 100", Voltage Rating=50, Automotive Qualification Standard=-, ComponentLink1Description=http://past.yageo.com/pdf/PYu-R_Packing_6.pdf, ComponentLink1URL=http://past.yageo.com/pdf/PYu-R_Packing_6.pdf, ComponentLink2Description=http://www.farnell.com/datasheets/2167052.pdf, ComponentLink2URL=http://www.farnell.com/datasheets/2167052.pdf, Manufacturer Part Number=RC0603FR-0710KL, MSL="MSL 1 - Unlimited<!--FANDB--><div class=\"features-and-benefits-container\"><div class=\"features-and-benefits-desc-container\"><span class=\"features-and-benefits-container-desc\">SMD Chip Resistor, Thick Film, 10 kohm, 50 V, 0603 [1608 Metric], 100 mW, ± 1", Packaging="Tape & Reel", Pricing 1="5000=0.0025, 25000=0.0014, 50000=0.0013 (GBP)", Product Range="RC Series", RoHS=YES, Stock 1=9995, Supplier 1=Mouser, Supplier 2=Farnell, Supplier 3=Digi-Key, Supplier Part Number 2=2421850, Supplier Part Number 3=311-10.0KHRCT-ND, SVHC="No SVHC (20-Jun-2016)"
R3 R7: library part WR06X1201FTL, "WALSIN - WR06X1201FTL - RESISTOR, THICK FILM, 1K2, 1%, 75V, 0603", Manufacturer=WALSIN, Power Rating=100, Resistance=1k2, Resistance Tolerance="± 1%", Resistor Case Style="0603 [1608 Metric]", Resistor Element Material="Thick Film", Supplier Part Number 1=2502404, Temperature Coefficient="± 100", Voltage Rating=75, Automotive Qualification Standard=-, ComponentLink1Description=http://www.farnell.com/datasheets/1960319.pdf, ComponentLink1URL=http://www.farnell.com/datasheets/1960319.pdf, Manufacturer Part Number=WR06X1201FTL, MSL="MSL 2 - 1 year<!--FANDB--><div class=\"features-and-benefits-container\"><div class=\"features-and-benefits-desc-container\"><span class=\"features-and-benefits-container-desc\">SMD Chip Resistor, 1.2 kohm, 75 V, 0603 [1608 Metric], 100 mW, ± 1%, WR06 Series</span></div><div class=\"features-and-benefits-description\"><span class=\"features-benefits-value\">The WR06 series resistors from Walsin are general purpose thick film chip resistors. These resistors are constructed in a high grade ceramic body (aluminium oxide).</span></div><div class=\"features-and-benefits-list\"><ul class=\"features-and-benefits-list-list\"><li class=\"features-and-benefits-list-item\">Resistance range includes E24 and E96 decade values from 1ohm to 10Mohm</li><li class=\"features-and-benefits-list-item\">EIA 0603 case size</li><li class=\"features-and-benefits-list-item\">Available in ?±100ppm/°C and -200ppm/°C to +400ppm/°C TCR values</li><li class=\"features-and-benefits-list-item\">Available in ±1% and ±5% tolerance</li><li class=\"features-and-benefits-list-item\">High reliability and stability</li><li class=\"features-and-benefits-list-item\">Higher component and equipment reliability</li><li class=\"features-and-benefits-list-item\">Lower assembly costs</li><li class=\"features-and-benefits-list-item\">Reduced size of final equipment</li><li class=\"features-and-benefits-list-item\">Continuous working voltage is 75V and rated power is 100", Packaging="Cut Tape", Pricing 1="10=0.0134, 100=0.0045, 500=0.0027, 1000=0.0019, 2500=0.0015 (GBP)", Product Range="WR06 Series", RoHS=YES, Stock 1=8072, Supplier 1=Farnell, Supplier 2=Newark, Supplier Part Number 2=58Y7264
R4 R9 R13: library part CRCW060351R0FKEA, "RES SMD 51 OHM 1% 1/10W 0603", Manufacturer="Vishay Dale", Operating Temperature="-55°C ~ 155°C", Package / Case="0603 (1608 Metric)", Power (Watts)="0.1W, 1/10W", Resistance=51R, Supplier Device Package=0603, Supplier Part Number 1=71-CRCW0603-51-E3, Temperature Coefficient=±100ppm/°C, Tolerance=±1%, Category=Resistors, ComponentLink1Description=http://www.vishay.com/docs/20035/dcrcwe3.pdf, ComponentLink1URL=http://www.vishay.com/docs/20035/dcrcwe3.pdf, Composition="Thick Film", Failure Rate=-, Features="Automotive AEC-Q200", Height - Seated (Max)="0.020\" (0.50mm)", Manufacturer Part Number=CRCW060351R0FKEA, Packaging="Cut Tape (CT)", Part Status=Active, Pricing 1="1=0.1, 10=0.042, 100=0.017, 1000=0.00764, 2500=0.00663 (USD)", RoHS="RoHS Compliant", Size / Dimension="0.063\" L x 0.033\" W (1.60mm x 0.85mm)", Stock 1=21691, Supplier 1=Mouser, Supplier 2=Farnell, Supplier 3=Digi-Key, Supplier Part Number 2=1652889, Supplier Part Number 3=541-51.0HCT-ND
R6: library part RC0603FR-072K4L, "RES SMD 2.4K OHM 1% 1/10W 0603", Manufacturer=Yageo, Operating Temperature="-55°C ~ 155°C", Package / Case="0603 (1608 Metric)", Power (Watts)="0.1W, 1/10W", Resistance=2k4, Supplier Device Package=0603, Supplier Part Number 1=603-RC0603FR-072K4L, Temperature Coefficient=±100ppm/°C, Tolerance=±1%, Category=Resistors, ComponentLink1Description=http://www.yageo.com/documents/recent/PYu-RC_Group_51_RoHS_L_8.pdf, ComponentLink1URL=http://www.yageo.com/documents/recent/PYu-RC_Group_51_RoHS_L_8.pdf, Composition="Thick Film", Failure Rate=-, Features="Moisture Resistant", Height - Seated (Max)="0.022\" (0.55mm)", Manufacturer Part Number=RC0603FR-072K4L, Packaging="Cut Tape (CT)", Part Status=Active, Pricing 1="1=0.1, 10=0.015, 100=0.006, 1000=0.00268, 2500=0.00233 (USD)", RoHS="RoHS Compliant", Size / Dimension="0.063\" L x 0.032\" W (1.60mm x 0.80mm)", Stock 1=577810, Supplier 1=Mouser, Supplier 2=Farnell, Supplier 3=Digi-Key, Supplier Part Number 2=1799329, Supplier Part Number 3=311-2.40KHRCT-ND
R8: library part MCWR06X1101FTL, "MULTICOMP - MCWR06X1101FTL - RES, THICK FILM, 1K1, 1%, 0.1W, 0603", Manufacturer=MULTICOMP, Power Rating=100, Resistance=1k1, Resistance Tolerance="± 1%", Resistor Case Style="0603 [1608 Metric]", Resistor Element Material="Thick Film", Supplier Part Number 1=2447274, Temperature Coefficient="± 100", Voltage Rating=50, Automotive Qualification Standard=-, ComponentLink1Description=http://www.farnell.com/datasheets/1849611.pdf, ComponentLink1URL=http://www.farnell.com/datasheets/1849611.pdf, Manufacturer Part Number=MCWR06X1101FTL, Packaging="Cut Tape", Pricing 1="10=0.0035, 100=0.0021, 500=0.0015, 1000=0.0012, 2500=0.001 (GBP)", Product Range="MCWR Series", RoHS=Y-EX, Stock 1=8493, Supplier 1=Farnell, SVHC="No SVHC (07-Jul-2017)<!--FANDB--><div class=\"features-and-benefits-container\"><div class=\"features-and-benefits-desc-container\"><span class=\"features-and-benefits-container-desc\">SMD Chip Resistor, Thick Film, 1.1 kohm, 50 V, 0603 [1608 Metric], 100 mW, ± 1"
R10: library part CRCW06031M00FKEB, "RES SMD 1M OHM 1% 1/10W 0603", Manufacturer="Vishay Dale", Operating Temperature="-55°C ~ 155°C", Package / Case="0603 (1608 Metric)", Power (Watts)="0.1W, 1/10W", Resistance=1M, Supplier Device Package=0603, Supplier Part Number 1=71-CRCW06031M00FKEB, Temperature Coefficient=±100ppm/°C, Tolerance=±1%, Category=Resistors, ComponentLink1Description=http://www.vishay.com/docs/20035/dcrcwe3.pdf, ComponentLink1URL=http://www.vishay.com/docs/20035/dcrcwe3.pdf, Composition="Thick Film", Failure Rate=-, Features="Automotive AEC-Q200", Height - Seated (Max)="0.020\" (0.50mm)", Manufacturer Part Number=CRCW06031M00FKEB, Packaging="Tape & Reel (TR)", Part Status=Active, Pricing 1="20000=0.00432, 30000=0.00405 (USD)", RoHS="RoHS Compliant", Size / Dimension="0.063\" L x 0.033\" W (1.60mm x 0.85mm)", Stock 1=0, Supplier 1=Mouser, Supplier 2=Farnell, Supplier 3=Digi-Key, Supplier Part Number 2=1853280, Supplier Part Number 3=CRCW06031M00FKEB-ND
U1: "4-ch, 2-input, 1.65-V to 3.6-V XOR (exclusive OR) gates 14-TSSOP -40 to 125", Case/Package=TSSOP, High Level Output Current=-24mA, Low Level Output Current=24mA, Manufacturer="Texas Instruments", Max Operating Temperature=125°C, Max Supply Voltage=3.6V, Min Operating Temperature=-40°C, Min Supply Voltage=1.65V, Package Quantity=1, Quiescent Current=1uA, Supplier Part Number 1=595-SN74LVC86APWR, Category="Logic Gates", ComponentLink1Description=https://datasheet.ciiva.com/14290/sn54lvc86a-14290721.pdf?src-supplier=Avnet, ComponentLink1URL=https://datasheet.ciiva.com/14290/sn54lvc86a-14290721.pdf?src-supplier=Avnet, ComponentLink2Description=https://datasheet.ciiva.com/41455/001017231-da-01-en-ic-qu-2in-exc-sn74lvc86apwr-tssop-14-tid-41455867.pdf?src-supplier=Conrad, ComponentLink2URL=https://datasheet.ciiva.com/41455/001017231-da-01-en-ic-qu-2in-exc-sn74lvc86apwr-tssop-14-tid-41455867.pdf?src-supplier=Conrad, ComponentLink3Description=https://datasheet.ciiva.com/46439/1847506-46439206.pdf?src-supplier=Element14, ComponentLink3URL=https://datasheet.ciiva.com/46439/1847506-46439206.pdf?src-supplier=Element14, ComponentLink4Description=https://datasheet.ciiva.com/1865/sn74lvc86a-1865017.pdf?src-supplier=Digi-Key, ComponentLink4URL=https://datasheet.ciiva.com/1865/sn74lvc86a-1865017.pdf?src-supplier=Digi-Key, ComponentLink5Description=https://datasheet.ciiva.com/1865/sn74lvc86a-1865016.pdf?src-supplier=Digi-Key, ComponentLink5URL=https://datasheet.ciiva.com/1865/sn74lvc86a-1865016.pdf?src-supplier=Digi-Key, ComponentLink6Description=https://datasheet.ciiva.com/1865/sn74lvc86a-1865018.pdf?src-supplier=Digi-Key, ComponentLink6URL=https://datasheet.ciiva.com/1865/sn74lvc86a-1865018.pdf?src-supplier=Digi-Key, ComponentLink7Description=https://datasheet.ciiva.com/15221/getdatasheetpartid-247160-15221930.pdf?src-supplier=Verical, ComponentLink7URL=https://datasheet.ciiva.com/15221/getdatasheetpartid-247160-15221930.pdf?src-supplier=Verical, Contact Plating=Gold, Height=1.15mm, Lead Free="Lead Free", Length=5mm, Logic Function=XOR, Manufacturer Part Number=SN74LVC86APWR, Mount="Surface Mount", Number of Bits=4, Number of Circuits=4, Number of Elements=4, Number of Gates=4, Number of Input Lines=2, Number of Inputs=2, Number of Output Lines=1, Number of Outputs=1, Number of Pins=14, Packaging="Tape and Reel", Pricing 1="1=0.49000, 10=0.39400, 50=0.39400, 100=0.24300, 1000=0.15100, 10000=0.13800 (USD)", Propagation Delay=4.4ns, Radiation Hardening=No, REACH SVHC="No SVHC", RoHS=Yes, RoHS Compliant=Yes, Schmitt Trigger Input=No, Stock 1=443, Supplier 1=Mouser, Supplier 2=Farnell, Supplier 3=Digi-Key, Supplier 4="Arrow Electronics", Supplier Part Number 2=3120672, Supplier Part Number 3=296-1242-1-ND, Supplier Part Number 4=SN74LVC86APWR, Turn-On Delay Time=4.6ns, Weight=0.002018oz, Width=4.4mm
U2: "2-channel, 10-MHz, 26-V output swing, low-noise audio op amp 8-SOIC 0 to 70", Case/Package=D, Dual Supply Voltage=9V, Input Bias Current=800nA, Input Offset Voltage (Vos)=4mV, Manufacturer="Texas Instruments", Max Dual Supply Voltage=15V, Max Operating Temperature=70°C, Min Dual Supply Voltage=5V, Min Operating Temperature=0°C, Nominal Supply Current=16mA, Operating Supply Current=8mA, Output Current=38mA, Package Quantity=1, Supplier Part Number 1=595-NE5532DR, Voltage Gain=100dB, Bandwidth=10MHz, Category="Amplifiers - Op Amps, Buffer, Instrumentation", Common Mode Rejection Ratio=70dB, ComponentLink1Description=https://datasheet.ciiva.com/1796/ne5532-1796190.pdf?src-supplier=Digi-Key, ComponentLink1URL=https://datasheet.ciiva.com/1796/ne5532-1796190.pdf?src-supplier=Digi-Key, ComponentLink2Description=https://datasheet.ciiva.com/1796/ne5532-1796189.pdf?src-supplier=Digi-Key, ComponentLink2URL=https://datasheet.ciiva.com/1796/ne5532-1796189.pdf?src-supplier=Digi-Key, ComponentLink3Description=https://datasheet.ciiva.com/1796/ne5532-1796191.pdf?src-supplier=Digi-Key, ComponentLink3URL=https://datasheet.ciiva.com/1796/ne5532-1796191.pdf?src-supplier=Digi-Key, Contact Plating=Gold, Gain Bandwidth Product=10MHz, Height=1.58mm, Lead Free="Lead Free", Length=4.9mm, Manufacturer Part Number=NE5532DR, Max I/O Voltage=4mV, Max Supply Voltage=15V, Nominal Gain Bandwidth Product=10MHz, Number of Amplifiers=2, Number of Channels=2, Number of Circuits=2, Number of Elements=2, Number of Pins=8, Output Current Per Channel=38mA, Packaging="Tape and Reel", Parameter 1=Jellybean, Pricing 1="1=0.60000, 10=0.51400, 50=0.51400, 100=0.35600, 500=0.30100, 1000=0.23300, 2500=0.21100, 10000=0.21100 (USD)", Radiation Hardening=No, REACH SVHC="No SVHC", RoHS=Yes, RoHS Compliant=Yes, Slew Rate=9V/µs, Supplier 1=Mouser, Supplier 2=Farnell, Supplier 3=Digi-Key, Supplier Part Number 2=3117312, Supplier Part Number 3=296-13622-6-ND, Unity Gain Bandwidth Product=10MHz, Width=3.91mm
U3: "IC REG LINEAR 200MA SOT23-5", Current - Output=200mA, Manufacturer=STMicroelectronics, Operating Temperature="-40°C ~ 125°C (TJ)", Package / Case="SC-74A, SOT-753", Supplier Device Package=SOT-23-5, Supplier Part Number 1=511-LDK320M33R, Voltage - Input (Max)=18V, Voltage - Output (Min/Fixed)=3.3V, Voltage Dropout (Max)="0.35V @ 200mA", Category="Integrated Circuits (ICs)", ComponentLink1Description=http://www.st.com/content/ccc/resource/technical/document/datasheet/0e/0c/26/c9/a4/d4/4b/a1/DM00236470.pdf/files/DM00236470.pdf/jcr:content/translations/en.DM00236470.pdf, ComponentLink1URL=http://www.st.com/content/ccc/resource/technical/document/datasheet/0e/0c/26/c9/a4/d4/4b/a1/DM00236470.pdf/files/DM00236470.pdf/jcr:content/translations/en.DM00236470.pdf, Control Features=Enable, Manufacturer Part Number=LDK320M33R, Mounting Type="Surface Mount", Output Configuration=Positive, Output Type=Fixed, Packaging="Cut Tape (CT)", Part Status=Active, Pricing 1="1=0.85, 10=0.748, 100=0.5733, 500=0.4532, 1000=0.36256 (USD)", Protection Features="Over Current, Over Temperature", PSRR="88dB (120Hz)", RoHS="RoHS Compliant", Stock 1=5592, Supplier 1=Mouser, Supplier 2=Farnell, Supplier 3=Digi-Key, Supplier Part Number 2=3130011, Supplier Part Number 3=497-17034-1-ND

## Free pads (board coordinates)
  round 5 hole 3.2 mask+0.05: 4(140,125) 5(185,125) 6(195,165) 7(140,165)

## Via types
v1: diameter 0.7, hole 0.3, Top Layer to Bottom Layer, 71 vias
v2: diameter 0.6, hole 0.3, Top Layer to Bottom Layer, 32 vias

## Nets (pads, with @x,y where several pads share a name; then routed paths per layer and width w, separated by ;. In a path a pad name is that pad's centre, name@x,y a point inside that pad or via, vN(x,y) a via of type N, cw(c..) or ccw(c..) an arc to the next point about the centre after c; other vN are vias at no path point)
+3V3: C1.2 C2.2 C14.2 R2.2 U1.14 U3.5 | length 23.2
  Top Layer w0.3: R2.2 153.3,159.5 v2(155.3,161.5) ; v2(157.4,161.7) 158.975,160.125 161.121,160.125 161.621,160.625 162.975,160.625 C14.2@163.05,160.7 ; U1.14 163,156.1
  Top Layer w0.5: 163,156.1 163,156.5 162.975,156.525 C2.2 162.975,157.775 163.05,157.85 163.05,160.7 C14.2 163.1,161.35 163.1,163.3 U3.5
  Bottom Layer w0.3: v2(155.3,161.5) 157.119,161.5 157.319,161.7 v2(157.4,161.7)
+5V: C13.2 C15.1 C17.2 J5.1 U2.8 U3.1 U3.3 | length 98.2
  Top Layer w0.2: U3.3 167.15,165.25 167.2,165.2
  Top Layer w0.3: U2.8 184.995,152.2 186.1,152.2 186.2,152.3 C17.2
  Top Layer w0.5: v2(160.1,147.8) 160.1,146.9 166.35,140.65 C15.1 166.35,132.35 167.5,131.2 J5.1 ; v2(160.1,151.5) 160.1,153.2 159.8,153.5 159.8,157.1 156.3,160.6 156.3,163.5 159.4,166.6 167.2,166.6 ; U3.1 165.5,163.35 165.55,163.3 C13.2 165.65,161.4 166.8,161.4 167.2,161.8 167.2,165.2 167.2,166.6 ; C17.2 186.825,165.475 185.7,166.6 167.2,166.6
  Bottom Layer w0.5: v2(160.1,147.8) v2(160.1,151.5)
-5V: C16.2 C18.2 J5.3 U2.4 | length 23.9
  Top Layer w0.3: C18.2 177.77,148.295 U2.4
  Top Layer w0.5: J5.3 174.5,130.7 175.85,132.05 C16.2 175.85,141.35 177.675,143.175 C18.2
GND: C1.1 C2.1 C7.1 C8.1 C9.1 C10.1 C12.1 C13.1 C14.1 C15.2 C16.1 C17.1 C18.1 J1.2 J2.2 J3.2 J4.1 J5.2 L1.2 pad.4 pad.5 pad.6 pad.7 R10.1 R11.1 R12.1 U1.1 U1.2 U1.5 U1.7 U1.9 U1.10 U2.3 U2.5 U3.2 | length 31.7
  Top Layer w0.3: v2(148.2,151.4) 148.2,151.481 148.3,151.581 R10.1 ; R11.1 154.9,156.219 155,156.319 v2(155,156.4) ; v2(156,156.2) 156.057,156.143 156.48,156.143 156.773,155.85 U1.1 ; v2(156.1,151.9) 156.131,151.931 157.381,151.931 U1.7 ; U1.5 157.419,153.269 158.665,153.269 v2(158.7,153.304) ; U1.2 v2(158.7,155.2) ; v2(161.7,153.2) 161.731,153.231 162.981,153.231 U1.10 ; U1.9 164.215,152.6 164.315,152.5 v2(164.396,152.5) ; v2(166.9,152.8) 166.95,152.85 166.95,153.55 167.25,153.85 L1.2 ; v2(167.9,152.7) L1.2 ; v2(168.8,152.7) 168.8,153.55 168.5,153.85 L1.2 ; v2(170.4,153.1) C12.1 ; C8.1 175.619,154 175.719,154.1 v2(175.8,154.1) ; C7.1 175.519,155.7 175.619,155.6 v2(175.7,155.6) ; C18.1 176.163,148.238 176.163,149.263 v2(176.2,149.3) ; U2.3 179.933,149.533 181.368,149.533 v2(181.4,149.5) ; v2(183.5,148.3) 183.503,148.297 184.898,148.297 U2.5 ; C17.1 188.387,152.312 188.387,153.488 v2(188.4,153.5) ; C10.1 v2(191.5,152.3) ; C9.1 v2(193,149)
  Top Layer w0.5: C14.1 v2(161.3,161.3) ; v2(160.7,157.6) C2.1 ; v2(160.7,159.3) C1.1 ; v2(164.2,164.3) U3.2 ; C13.1 v2(169.6,161.3) ; v2(182.5,131.8) R12.1
  other v1: 145,125 150,125 155,125 160,125 165,125 170,125 175,125 180,125 190,125 140,130 145,130 150,130 155,130 160,130 165,130 170,130 180,130 185,130 190,130 140,135 145,135 150,135 155,135 160,135 170,135 180,135 190,135 140,140 145,140 150,140 155,140 160,140 165,140 170,140 180,140 140,145 145,145 150,145 155,145 160,145 175,145 180,145 185,145 150,150 155,150 170,150 195,150 140,155 180,155 185,155 190,155 195,155 140,160 145,160 150,160 155,160 170,160 175,160 180,160 185,160 190,160 195,160 145,165 150,165 155,165 160,165 170,165 175,165 180,165 185,165 190,165
NetC3_1: C3.1 R6.2 U2.2 | length 4
  Top Layer w0.3: C3.1 R6.2 178.4,150.6 178.635,150.835 U2.2
NetC3_2: C3.2 R1.2 R7.1 U2.1 | length 24.2
  Top Layer w0.3: R1.2 C3.2 176.125,153.149 176.376,153.4 178.275,153.4 178.45,153.224 178.45,152.35 178.601,152.199 178.695,152.105 U2.1 181.795,152.105 182.6,151.3 182.6,147.4 183.3,146.7 188.8,146.7 189.2,147.1 191.1,147.1 191.35,147.35 R7.1
NetC4_1: C4.1 R8.2 U2.6 | length 3.9
  Top Layer w0.3: U2.6 184.935,149.6 185.9,149.6 186.2,149.9 C4.1
  Top Layer w0.5: R8.2 C4.1
NetC4_2: C4.2 R3.2 R9.1 R13.2 U2.7 | length 20.2
  Top Layer w0.3: v2(181.7,148.4) 181.7,143.1 182.1,142.7 182.7,142.7 R9.1 R13.2 ; v2(183.304,150.5) 183.304,150.504 183.635,150.835 U2.7 188.264,150.835 188.475,150.624 C4.2 R3.2
  Bottom Layer w0.3: v2(181.7,148.4) 182.502,149.202 182.502,149.698 v2(183.304,150.5)
NetC5_1: C5.1 J2.1 R10.2 | length 8.2
  Top Layer w0.3: J2.1 C5.1
NetC5_2: C5.2 R2.1 R11.2 U1.4 | length 5.7